# EAGLE board solar_tracker (EAGLE 6.1)
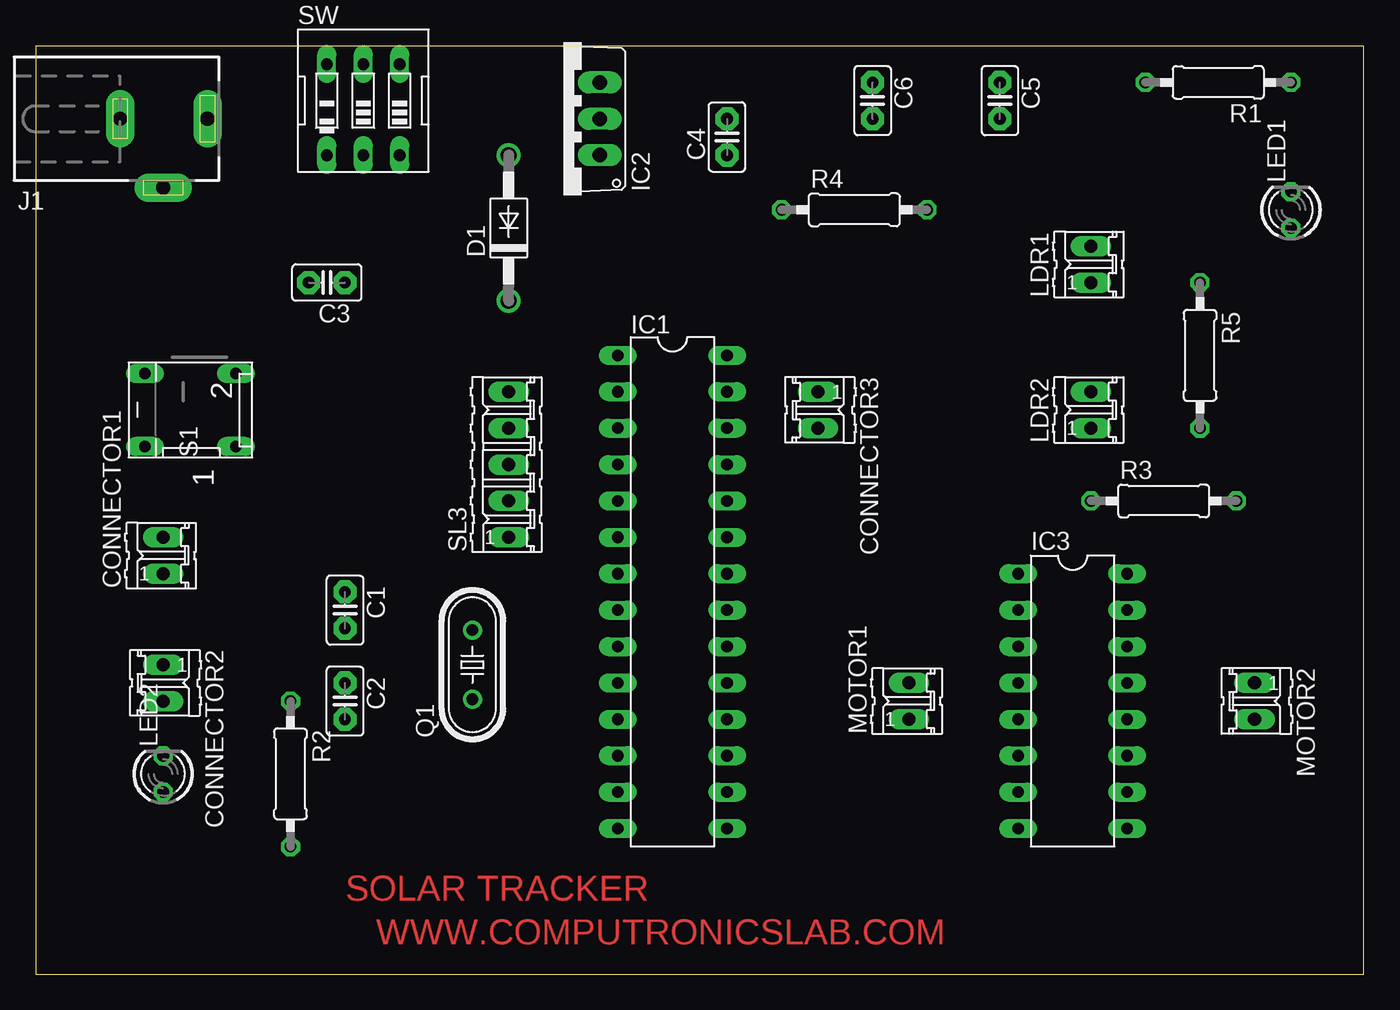
[diagram p0: board, top side]
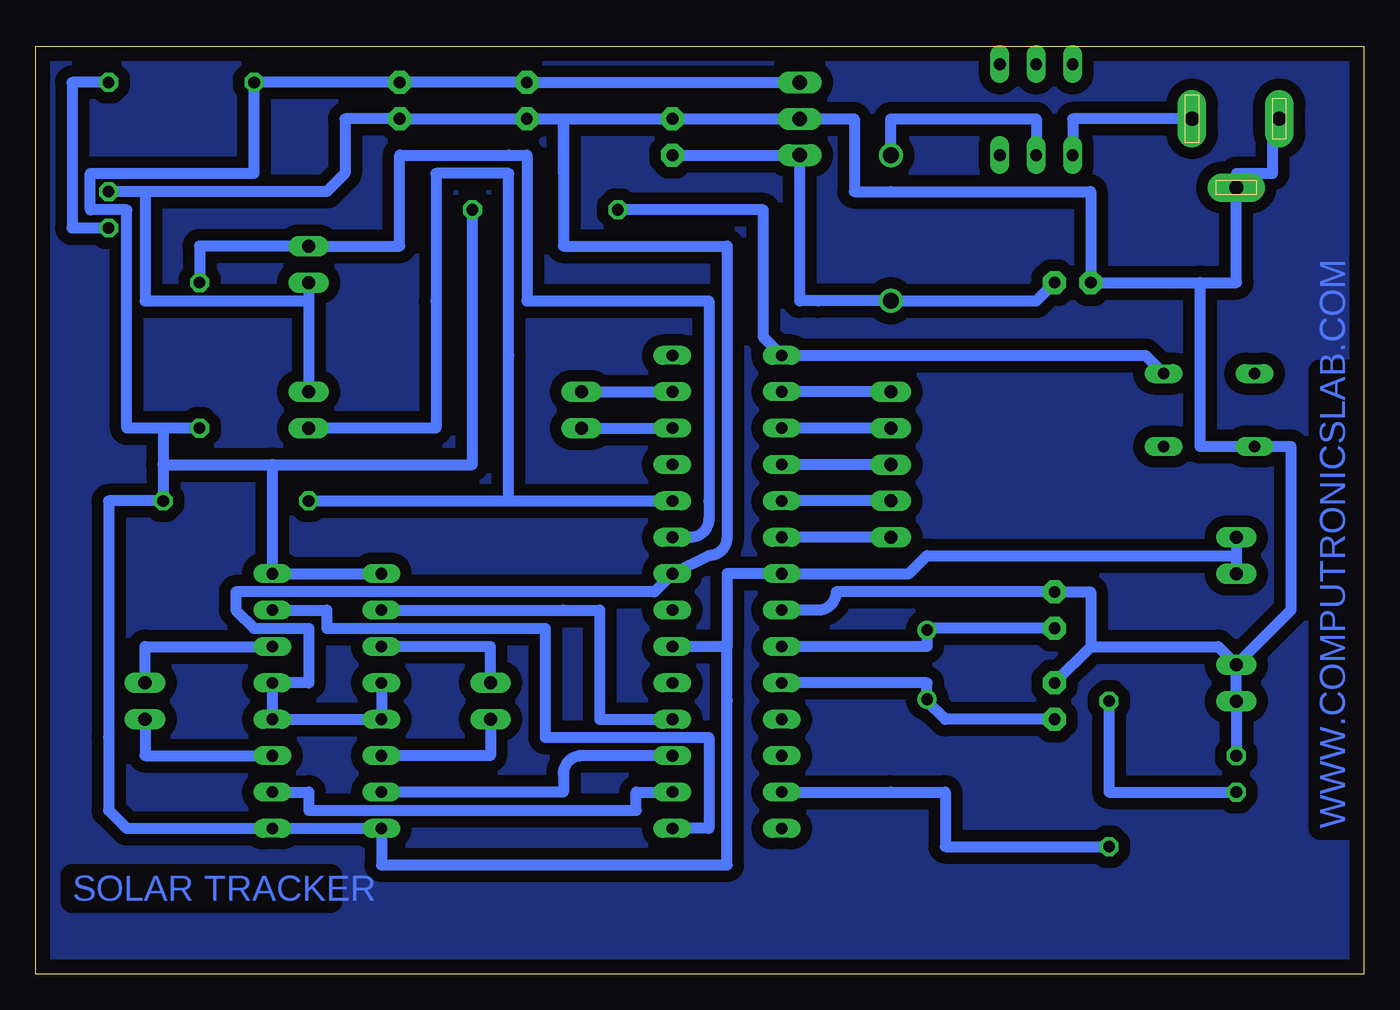
[diagram p1: board, bottom side, seen from below]

Size 92.71 x 64.76 mm. Coordinates in mm from the lower left corner, seen from the top.
Outline: 0,0 92.71,0 92.71,64.76 0,64.76 0,0
Copper layers (1*16): Top 0.035mm / dielectric 1.5mm / Bottom 0.035mm
Design rules: minimum track width 30mil, minimum drill 24mil, track to track 8mil, track to pad 8mil, pad to pad 8mil, via to via 8mil, smd to smd 8mil, copper to edge 40mil, drill to drill 8mil, minimum pad ring 10mil, minimum via ring 8mil, stop-mask expansion 4mil, vias tented up to drill 0mil, thermal gap 10mil

## Footprints (pad centres in the part's own frame; a part is rotated, then mirrored left to right if it is on the bottom)
C2.5-2 = drill 0.813 pad 1.6 octagon: 1 -1.27,0; 2 1.27,0
02P = drill 0.914 long: 1 -1.27,0; 2 1.27,0
DO41-10 = drill 1.118: A 5.08,0; C -5.08,0
DIL28-3 = drill 0.813 long: 1 -16.51,-3.81; 2 -13.97,-3.81; 3 -11.43,-3.81; 4 -8.89,-3.81; 5 -6.35,-3.81; 6 -3.81,-3.81; 7 -1.27,-3.81; 8 1.27,-3.81; 9 3.81,-3.81; 10 6.35,-3.81; 11 8.89,-3.81; 12 11.43,-3.81; 13 13.97,-3.81; 14 16.51,-3.81; 15 16.51,3.81; 16 13.97,3.81; 17 11.43,3.81; 18 8.89,3.81; 19 6.35,3.81; 20 3.81,3.81; 21 1.27,3.81; 22 -1.27,3.81; 23 -3.81,3.81; 24 -6.35,3.81; 25 -8.89,3.81; 26 -11.43,3.81; 27 -13.97,3.81; 28 -16.51,3.81
TO220V = drill 1.016 long: 1 -2.54,-2.54; 2 0,-2.54; 3 2.54,-2.54
DIL16 = drill 0.813 long: 1 -8.89,-3.81; 2 -6.35,-3.81; 3 -3.81,-3.81; 4 -1.27,-3.81; 5 1.27,-3.81; 6 3.81,-3.81; 7 6.35,-3.81; 8 8.89,-3.81; 9 8.89,3.81; 10 6.35,3.81; 11 3.81,3.81; 12 1.27,3.81; 13 -1.27,3.81; 14 -3.81,3.81; 15 -6.35,3.81; 16 -8.89,3.81
DCJ0303 = drill 1 pad 2 long: 1 0,3.1; 2 4.8,0; 3 0,-3
LED3MM = drill 0.813 octagon: A -1.27,0; K 1.27,0
HC49/S = drill 0.813: 1 -2.413,0; 2 2.413,0
0207/10 = drill 0.813 octagon: 1 -5.08,0; 2 5.08,0
DP-02 = drill 0.813 long: 1 -2.54,-2.54; 2 2.54,-2.54; 3 2.54,3.81; 4 -2.54,3.81
05P = drill 0.914 long: 1 -5.08,0; 2 -2.54,0; 3 0,0; 4 2.54,0; 5 5.08,0
EDG-03 = drill 0.813 long: 1 -2.54,-3.81; 2 0,-3.81; 3 2.54,-3.81; 4 2.54,2.54; 5 0,2.54; 6 -2.54,2.54

## Placement (x,y rotation side)
C1  22pf  [C2.5-2]  21.59,25.4 270 top
C2  22pf  [C2.5-2]  21.59,19.05 270 top
C3  100uF  [C2.5-2]  20.32,48.26 180 top
C4  0.1uf  [C2.5-2]  48.26,58.42 90 top
C5  0.1uf  [C2.5-2]  67.31,60.96 270 top
C6  4.7uf  [C2.5-2]  58.42,60.96 270 top
CONNECTOR1  2pin  [02P]  8.89,29.21 90 top
CONNECTOR2  2 pin  [02P]  8.89,20.32 270 top
CONNECTOR3  [02P]  54.61,39.37 270 top
D1  1N4007  [DO41-10]  33.02,52.07 90 top
IC1  ATMEGA328  [DIL28-3]  44.45,26.67 270 top
IC2  7805  [TO220V]  36.83,59.69 90 top
IC3  L293D  [DIL16]  72.39,19.05 270 top
J1  [DCJ0303]  8.89,59.69 270 top
LDR1  [02P]  73.66,49.53 90 top
LDR2  [02P]  73.66,39.37 90 top
LED1  3mm  [LED3MM]  87.63,53.34 90 top
LED2  3mm  [LED3MM]  8.89,13.97 90 top
MOTOR1  [02P]  60.96,19.05 90 top
MOTOR2  [02P]  85.09,19.05 270 top
Q1  16MHZ  [HC49/S]  30.48,21.59 90 top
R1  220R  [0207/10]  82.55,62.23 180 top
R2  330R  [0207/10]  17.78,13.97 270 top
R3  10K  [0207/10]  78.74,33.02 0 top
R4  10K  [0207/10]  57.15,53.34 0 top
R5  10K  [0207/10]  81.28,43.18 270 top
S1  push switch  [DP-02]  11.43,39.37 90 top
SL3  5 pin  [05P]  33.02,35.56 90 top
SW  on/of button  [EDG-03]  22.86,60.96 0 top

## Library data of the parts
C1-C6 = capacitor-wima
CONNECTOR1-CONNECTOR3 LDR1 LDR2 MOTOR1 MOTOR2 SL3 = con-amp-quick; OC_FARNELL: unknown; OC_NEWARK: unknown
D1 = diode
IC1 = quantum-research-group; OC_FARNELL: unknown; OC_NEWARK: unknown
IC2 = linear
IC3 = st-microelectronics; MPN: L293D; OC_FARNELL: 9589619; OC_NEWARK: 56P8249
J1 = con-jack; OC_FARNELL: unknown; OC_NEWARK: unknown
LED1 LED2 = led
Q1 = crystal; OC_FARNELL: 1667008; OC_NEWARK: unknown
R1-R5 = rcl
S1 = switch-dil; MPN: MCDP02; OC_FARNELL: 1255233; OC_NEWARK: 26M1095
SW = special

## Nets
N$1: C1.2 IC1.9 Q1.2
N$2: C2.2 IC1.10 Q1.1
N$3: J1.1 SW.1
N$4: C5.1 C6.1 CONNECTOR1.1 CONNECTOR1.2 IC1.7 IC1.20 IC2.3 IC3.1 IC3.8 IC3.9 IC3.16 R1.2 R3.2 R4.2 R5.2
N$5: C1.1 C2.1 C3.2 C4.2 C5.2 C6.2 CONNECTOR2.1 CONNECTOR2.2 IC1.8 IC1.22 IC2.2 IC3.4 IC3.5 IC3.12 IC3.13 J1.2 J1.3 LDR1.1 LDR2.2 LED1.K LED2.K S1.4
N$6: LED1.A R1.1
N$7: IC1.17 IC3.7
N$8: IC1.6 SL3.1
N$9: IC1.5 SL3.2
N$10: IC1.4 SL3.3
N$11: IC1.3 SL3.4
N$12: CONNECTOR3.1 IC1.27
N$13: CONNECTOR3.2 IC1.26
N$14: IC1.2 SL3.5
N$15: IC1.18 IC3.2
N$16: IC1.15 IC3.15
N$17: IC1.13 R2.2
N$18: D1.A SW.2
N$19: IC1.23 LDR1.2 R5.1
N$20: IC1.24 LDR2.1 R3.1
N$21: IC1.16 IC3.10
N$22: C3.1 C4.1 D1.C IC2.1
N$25: IC3.14 MOTOR2.1
N$28: IC3.11 MOTOR2.2
N$31: IC1.1 R4.1 S1.2
N$32: LED2.A R2.1
N$34: IC3.6 MOTOR1.1
N$35: IC3.3 MOTOR1.2

## Tracks (layer width: path | path; a pad name or v marks a point on that pad's centre or on a via)
N$1
  Bottom 0.762: C1.2 30.48,24.13 | 30.48,24.13 Q1.2 30.48,24.13 | IC1.9 30.48,22.86 30.48,24.13
N$2
  Bottom 0.762: 30.48,19.05 29.21,17.78 C2.2 | 30.48,19.05 Q1.1 30.48,19.05 | IC1.10 30.48,20.32 30.48,19.05
N$3
  Bottom 0.762: SW.1 20.32,59.69 12.7,59.69 J1.1
N$4
  Bottom 0.762: CONNECTOR1.2 8.89,29.21 | 8.89,29.21 CONNECTOR1.1 | 44.45,22.86 44.45,27.94 43.18,27.94 IC1.7 31.75,27.94 30.48,29.21 8.89,29.21 | 44.45,22.86 IC1.20 44.45,22.86 | IC2.3 C6.1 C5.1 R1.2 77.47,55.88 88.9,55.88 88.9,53.34 86.36,53.34 86.36,38.1 R5.2 83.82,38.1 83.82,35.56 | IC3.1 IC3.16 76.2,35.56 | 83.82,35.56 R3.2 87.63,33.02 87.63,16.51 87.63,11.43 86.36,10.16 IC3.9 IC3.8 68.58,7.62 44.45,7.62 44.45,19.05 44.45,22.86 | R4.2 62.23,35.56 76.2,35.56 | 83.82,35.56 76.2,35.56
N$5
  Bottom 0.762: LED2.K CONNECTOR2.2 CONNECTOR2.1 | IC1.8 38.1,25.4 arc-90 36.83,26.67 C1.1 19.05,26.67 19.05,22.86 | 19.05,22.86 C2.1 | CONNECTOR2.1 10.16,22.86 19.05,22.86 | J1.3 6.35,59.69 6.35,55.88 8.89,55.88 J1.2 8.89,54.61 8.89,48.26 11.43,48.26 | 11.43,48.26 11.43,36.83 S1.4 5.08,36.83 5.08,25.4 CONNECTOR2.1 | 11.43,48.26 C3.2 19.05,54.61 33.02,54.61 35.56,54.61 35.56,59.69 38.1,59.69 IC2.2 C4.2 52.07,59.69 55.88,59.69 | IC3.4 IC3.5 IC3.12 IC3.13 73.66,20.32 73.66,24.13 77.47,24.13 78.74,25.4 78.74,26.67 49.53,26.67 IC1.22 45.72,29.21 arc-90 44.45,30.48 44.45,31.75 44.45,44.45 44.45,50.8 55.88,50.8 55.88,55.88 | LDR1.1 73.66,46.99 | 73.66,46.99 LDR2.2 | 59.69,59.69 55.88,59.69 | 55.88,59.69 55.88,55.88 | 59.69,59.69 C5.2 71.12,59.69 71.12,55.88 72.39,54.61 85.09,54.61 | 85.09,54.61 LED1.K | 59.69,59.69 C6.2 | 73.66,46.99 85.09,46.99 85.09,54.61 | 55.88,55.88 55.88,59.69
N$6
  Bottom 0.762: LED1.A 90.17,52.07 90.17,62.23 R1.1
N$7
  Bottom 0.762: IC3.7 55.88,12.7 55.88,13.97 arc90 54.61,15.24 53.34,15.24 IC1.17
N$8
  Bottom 0.762: SL3.1 IC1.6
N$9
  Bottom 0.762: SL3.2 IC1.5
N$10
  Bottom 0.762: SL3.3 IC1.4
N$11
  Bottom 0.762: SL3.4 IC1.3
N$12
  Bottom 0.762: CONNECTOR3.1 IC1.27
N$13
  Bottom 0.762: CONNECTOR3.2 IC1.26
N$14
  Bottom 0.762: SL3.5 IC1.2
N$15
  Bottom 0.762: IC1.18 53.34,17.78 53.34,25.4 55.88,25.4 IC3.2
N$16
  Bottom 0.762: IC1.15 45.72,10.16 45.72,16.51 53.34,16.51 57.15,16.51 57.15,24.13 60.96,24.13 72.39,24.13 72.39,25.4 IC3.15
N$17
  Bottom 0.762: R2.2 29.21,8.89 29.21,12.7 33.02,12.7 IC1.13
N$18
  Bottom 0.762: SW.2 22.86,59.69 30.48,59.69 33.02,59.69 D1.A
N$19
  Bottom 0.762: IC1.23 46.99,30.48 arc-90 45.72,31.75 45.72,33.02 45.72,46.99 58.42,46.99 58.42,57.15 59.69,57.15 67.31,57.15 67.31,50.8 LDR1.2 81.28,50.8 R5.1
N$20
  Bottom 0.762: 59.69,33.02 IC1.24 | R3.1 59.69,33.02 | LDR2.1 72.39,38.1 64.77,38.1 64.77,46.99 64.77,55.88 59.69,55.88 59.69,43.18 59.69,33.02
N$21
  Bottom 0.762: IC1.16 50.8,12.7 50.8,11.43 52.07,11.43 73.66,11.43 73.66,12.7 IC3.10
N$22
  Bottom 0.762: C4.1 IC2.1 39.37,46.99 38.1,46.99 D1.C 22.86,46.99 C3.1
N$23
  pour Bottom (isolate 0.813): 5.08,0 3.81,0 arc-90 0,3.81 0,60.96 arc-90 3.81,64.77 88.9,64.77 arc-90 92.71,60.96 92.71,2.54 arc-90 90.17,0
N$25
  Bottom 0.762: IC3.14 85.09,22.86 MOTOR2.1
N$28
  Bottom 0.762: IC3.11 85.09,15.24 MOTOR2.2
N$31
  Bottom 0.762: S1.2 15.24,43.18 IC1.1 41.91,44.45 41.91,53.34 R4.1
N$32
  Bottom 0.762: LED2.A 17.78,12.7 R2.1
N$34
  Bottom 0.762: IC3.6 60.96,15.24 MOTOR1.1
N$35
  Bottom 0.762: IC3.3 60.96,22.86 MOTOR1.2

## Text on the board
Top: SOLAR TRACKER | WWW.COMPUTRONICSLAB.COM
Bottom: WWW.COMPUTRONICSLAB.COM | SOLAR TRACKER